# Altium PCB PCB1.PcbDoc
Units mil, origin at the board's own origin, x right, y up, seen from the top; angles counter-clockwise.
Board outline 1200 x 840 mil, 2 copper layers (Top Layer, Bottom Layer); 34 components, 32 nets, 126 pads, 55 vias.
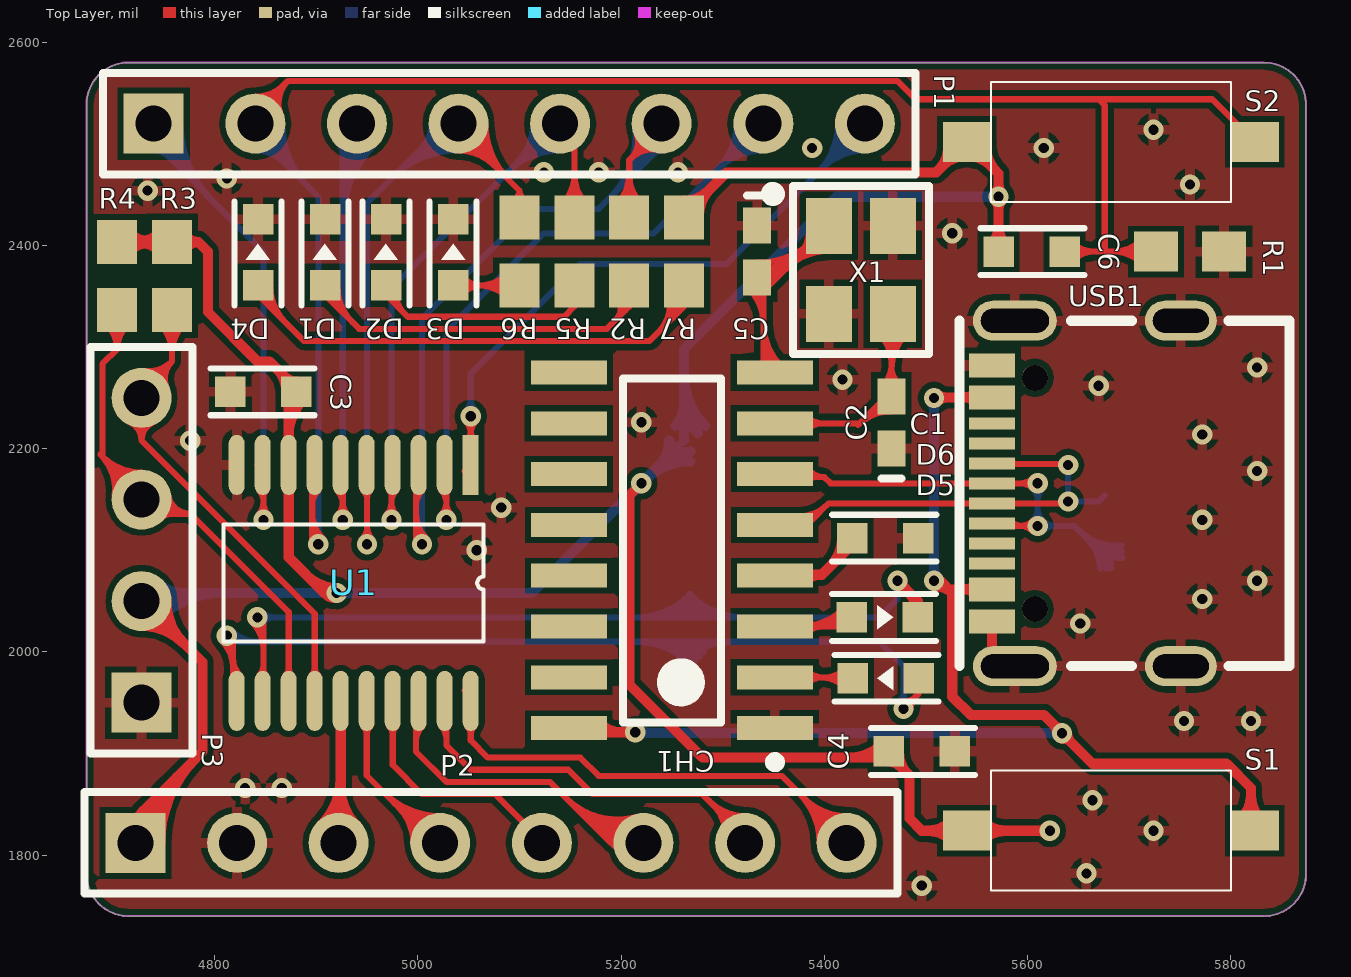
[diagram p0: Top Layer view]
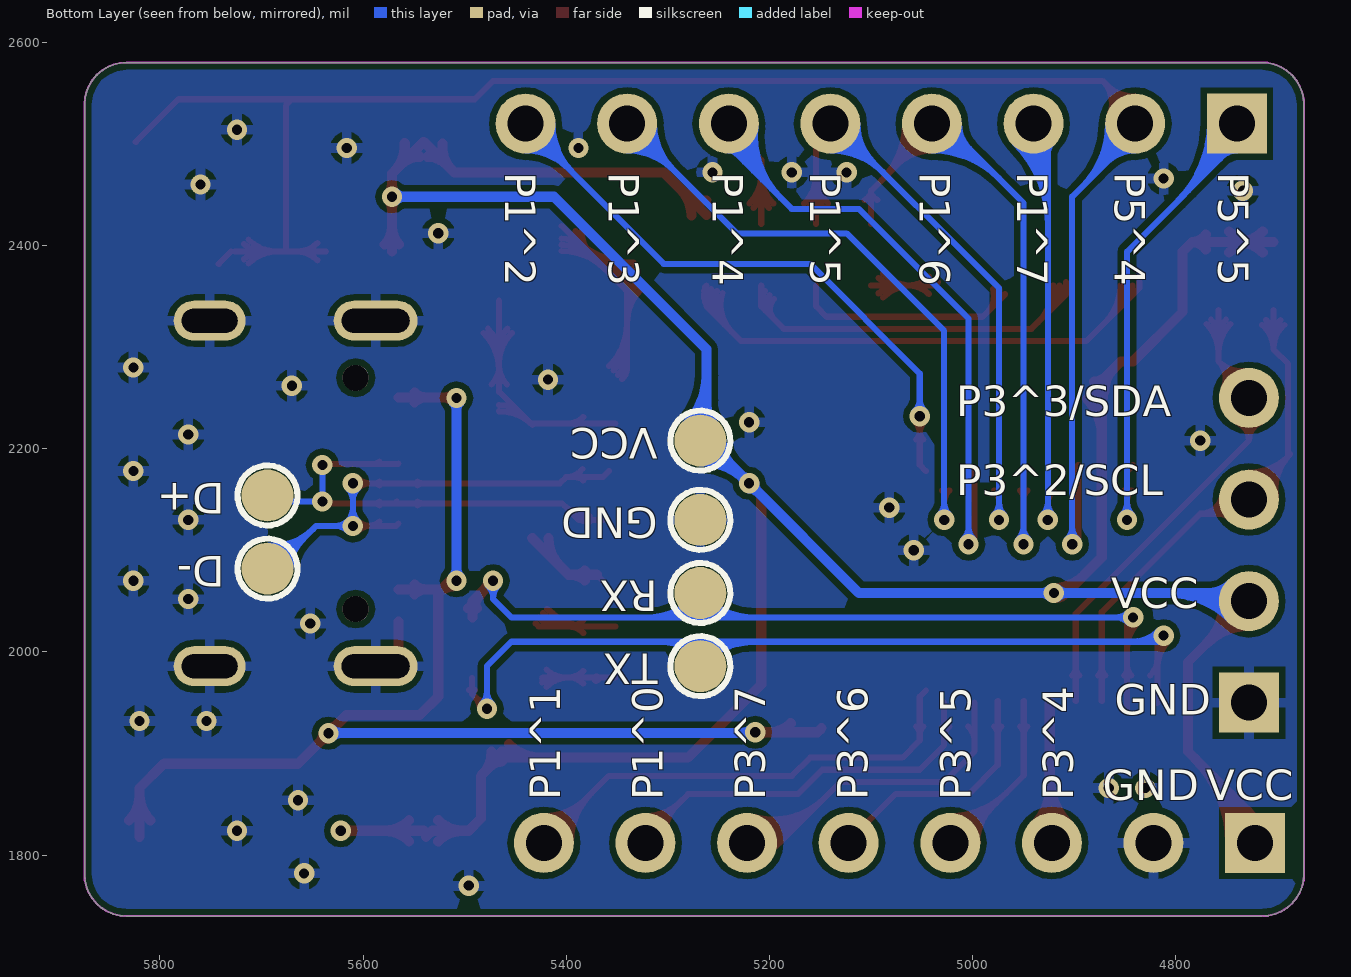
[diagram p1: Bottom Layer view, seen from below]

## Layer stack, top to bottom
Top Layer: signal copper 1.4
Dielectric: dielectric 12.6, FR-4, Dk 4.8
Bottom Layer: signal copper 1.4

## Board outline
4674,1794 4674,1780.97 ccw(c4714.97,1780.97) 4686,1752 ccw(c4714.97,1780.97) 4714.97,1740 4752,1740 5833.03,1740 ccw(c5833.03,1780.97) 5862,1752 ccw(c5833.03,1780.97) 5874,1780.97 5874,1806 5874,2539.03 ccw(c5833.03,2539.03) 5862,2568 ccw(c5833.03,2539.03) 5833.03,2580 5802,2580 4714.97,2580 ccw(c4714.97,2539.03) 4686,2568 ccw(c4714.97,2539.03) 4674,2539.03 4674,2538

## Design rules (kind name [scope] priority, off if disabled: settings)
Clearance [All] p1: gap=6
ComponentClearance [All] p1: gap=6 collisioncheckmode=3 verticalgap=6 showdistances=FALSE
FabricationTestPointUsage TestPointUsage [All] p1: valid=0 allowmultiple=FALSE
FabricationTestpoint Testpoint [All] p1: side=3 testpointundercomponent=TRUE minsize=40 maxsize=100 preferedsize=60 minholesize=0 maxholesize=40 preferedholesize=32 testpointgrid=1 allowsidetop=TRUE allowsidebottom=TRUE usegrid=TRUE gridtolerance=0.01
HoleToHoleClearance [All] p1: gap=6 allowstackedmicrovias=TRUE
MinimumSolderMaskSliver [All] p1 off: minsoldermaskwidth=6
PolygonConnect [All] p1: connectstyle=Relief reliefconductorwidth=10 reliefentries=4 polygonreliefangle="90 Angle"
RoutingVias [All] p1: holewidth=28 width=50 viastyle="Through Hole" minholewidth=6 minwidth=10 maxholewidth=28 maxwidth=50
SilkscreenOverComponentPads [All] p1: minsilkscreentomaskgap=6
SolderMaskExpansion [All] p1: expansion=4
Width [All] p1: maxlimit=10 minlimit=6 preferedwidth=10
22 further rules are at their usual default settings.

## Components (designator, comment, footprint, x,y, rotation, side; value= is the part's Value field where it differs from the comment)
C1 "Cap Semi" C0603 5460,2112 r0 top
C2 "Cap Semi" 0402 5466,2226 r90 top
C3 "10nF" C0603 4848,2256 r0 top
C4 "22uF" C0603 5496,1902 r180 top
C5 "Cap Semi" 0402 5334,2394 r270 top
C6 "" C0603 5604,2394 r180 top
CH1 "" SOIC127P600X170-16N 5250,2100 r180 top
D1 "LED3" 0603D#1 4914,2388 r90 top
D2 "LED3" 0603D#1 4974,2388 r90 top
D3 "LED3" 0603D#1 5040,2388 r90 top
D4 "LED3" 0603D#1 4848,2388 r90 top
D5 "100R/DIO" 0603D#2 5460,1974 r180 top
D6 "1N5819" 0603D#2 5460,2034 r0 top
D+ "Comment" "Test Point" 5694,2154 r180 bottom
D- "Comment" "Test Point" 5694,2082 r180 bottom
GND "Comment" "Test Point" 5268,2130 r180 bottom
P1 "IO1" HDR1X8 4740,2520 r0 top
P2 "IO2" HDR1X8 4722,1812 r0 top
P3 "IIC" HDR1X4 4728,1950 r90 top
R1 "10K" J1-0603 5760,2394 r180 top
R2 "1K" J1-0603 5208,2394 r270 top
R3 "Res3" J1-0603 4758,2370 r90 top
R4 "Res3" J1-0603 4704,2370 r90 top
R5 "1K" J1-0603 5154,2394 r270 top
R6 "1K" J1-0603 5100,2394 r270 top
R7 "1K" J1-0603 5262,2394 r270 top
RX "Comment" "Test Point" 5268,2058 r180 bottom
S1 "SW-PB" KEY_1 5682,1824 r0 top
S2 "SW-PB" KEY_1 5682,2502 r180 top
TX "Comment" "Test Point" 5268,1986 r180 bottom
U1 "STC8G1K08T-TSSOP20" TSSOP20 5052,2184 r270 top locked
USB1 "TYPE-C16PIN" USB-C-SMD_TYPE-C16PIN 5658,2156 r90 top
VCC "Comment" "Test Point" 5268,2208 r180 bottom
X1 "32M" LC_SMD-3225_4P 5436,2376 r270 top

## Footprints (in the part's own frame and the unit in brackets; to place one, negate y for a bottom-side part, rotate by r counter-clockwise, add the part's x,y. Pads: shape width x height; smd on the part's side, far side on the other; paste and mask are expansions set on the pad)
0402 [mm] "Chip Capacitor; Body 1.0 x 0.5 mm (LxW typ)"
  rect 0.9x0.7 smd: 1(-0.65,0) 2(0.65,0)
  silkscreen extent -1.4,-0.25 -1.4,0.25
0603D#1 [mil]
  rect 30x30 smd mask+4: 1(-27.18,5.35) 2(37.82,5.35)
  silkscreen extent -47,-18 55,28, body extent -26,-10 37,21, height 34
0603D#2 [mil]
  rect 30x30 smd mask+4: 1(-32.81,-0.08) 2(32.19,-0.08)
  silkscreen extent -52,-23 50,23, body extent -32,-16 31,16, height 34
C0603 [mil]
  rect 30x30 smd mask+4: 1(-32.5,0) 2(32.5,0)
  silkscreen extent -52,-23 50,23, body extent -31,-16 31,16, height 34
HDR1X4 [mm] "Connector; Header; 4 Position"
  rect 1.5x1.5 hole 0.9: 1(0,0)
  round 1.5 hole 0.9: 2(2.54,0) 3(5.08,0) 4(7.62,0)
  silkscreen extent -1.27,-1.27 8.89,1.27
HDR1X8 [mm] "Connector; Header; 8 Position"
  rect 1.5x1.5 hole 0.9: 1(0,0)
  round 1.5 hole 0.9: 2(2.54,0) 3(5.08,0) 4(7.62,0) 5(10.16,0) 6(12.7,0) 7(15.24,0) 8(17.78,0)
  silkscreen extent -1.27,-1.27 19.05,1.27
J1-0603 [mm] "Chip Resistor; Body 1.6 x 0.8 mm (LxW typ)"
  rect 1.1x1 smd: 1(-0.85,0) 2(0.85,0)
KEY_1 [mm]
  rect 1.2x1 smd: 1(-3.6,0) 2(3.6,0)
  silkscreen extent -3,-1.5 3,1.5, body extent -4,-1.5 4,1.5, height 4.3
LC_SMD-3225_4P [mm]
  rect 1.4x1.15 smd: 1(-1.1,-0.8) 2(1.1,-0.8) 3(1.1,0.8) 4(-1.1,0.8)
  silkscreen extent -2.1,-2.35 2.1,1.7, body extent -1.6,-1.25 1.6,1.25, height 0.61
SOIC127P600X170-16N [mm] "SOIC, 16-Leads, Body 8.6x4.0mm (max), Pitch 1.27mm, IPC Medium Density"
  rect 1.9x0.6 smd: 1(-2.575,4.445) 2(-2.575,3.175) 3(-2.575,1.905) 4(-2.575,0.635) 5(-2.575,-0.635) 6(-2.575,-1.905) 7(-2.575,-3.175) 8(-2.575,-4.445) 9(2.575,-4.445) 10(2.575,-3.175) 11(2.575,-1.905) 12(2.575,-0.635) 13(2.575,0.635) 14(2.575,1.905) 15(2.575,3.175) 16(2.575,4.445)
  silkscreen extent -2.7,-4.3 1.22,5.42, body extent -1.98,-4.28 1.97,4.28, height 1.7
"Test Point" [mm]
  round 1.3 smd mask+0.102: 1(0,0)
  silkscreen extent -0.75,-0.75 0.75,0.75
TSSOP20 [mm]
  rect 1.5x0.4 smd: 1(0,0)
  oval 1.5x0.4 smd: 2(0,-0.65) 3(0,-1.3) 4(0,-1.95) 5(0,-2.6) 6(0,-3.25) 7(0,-3.9) 8(0,-4.55) 9(0,-5.2) 10(0,-5.85) 11(5.9,-5.85) 12(5.9,-5.2) 13(5.9,-4.55) 14(5.9,-3.9) 15(5.9,-3.25) 16(5.9,-2.6) 17(5.9,-1.95) 18(5.9,-1.3) 19(5.9,-0.65) 20(5.9,0)
  silkscreen extent 1.48,-6.18 4.42,0.33
USB-C-SMD_TYPE-C16PIN [mm]
  oval 1x2.099 hole 0.6 slot 1.7 at 90 deg: 1(-4.32,1.787) 2(4.32,1.787)
  oval 1x1.799 hole 0.6 slot 1.4 at 90 deg: 3(-4.32,-2.362) 4(4.32,-2.362)
  rect 0.6x1.15 smd: A1B12(-3.2,2.362) A4B9(-2.4,2.362) B1A12(3.2,2.362) B4A9(2.4,2.362)
  rect 0.3x1.15 smd: A5(-1.25,2.362) A6(-0.25,2.362) A7(0.25,2.362) A8(-1.75,2.362) B5(1.75,2.362) B6(0.75,2.362) B7(-0.75,2.362) B8(1.25,2.362)
  round 0.65 hole 0.65 unplated: ""(-2.89,1.288) ""(2.89,1.288)
  silkscreen extent -4.32,-5.08 4.32,3.17

## Part data
C1 C2 C5: "Capacitor (Semiconductor SIM Model)"
C3 C4 C6: library part "Cap Semi", "Capacitor (Semiconductor SIM Model)"
CH1: library part Component_1
D1 D2 D3 D4: "Typical BLUE SiC LED"
D5 D6: library part Diode, "Default Diode"
P1 P2: library part "Header 8", "Header, 8-Pin"
P3: library part "Header 4", "Header, 4-Pin"
R1 R2 R5 R6 R7: library part Res3, "Resistor"
R3 R4: "Resistor"
S1 S2: "Switch"
X1: library part XTAL_SMD2016_32MHz_8pF_Epson, "XTAL SMD 2016, 32MHz, Cl=8pF, Tol: ?0ppm, Stab: ?0ppm"

## Via types
v1: diameter 20, hole 10, Top Layer to Bottom Layer, tented both sides, 55 vias

## Nets (pads, with @x,y where several pads share a name; then routed paths per layer and width w, separated by ;. In a path a pad name is that pad's centre, name@x,y a point inside that pad or via, vN(x,y) a via of type N, cw(c..) or ccw(c..) an arc to the next point about the centre after c; other vN are vias at no path point)
GND: C1.2 C2.1 C3.1 C4.1 C5.1 CH1.1 D1.2 D2.2 D3.2 D4.2 GND.1 P2.2 P3.1 R1.1 U1.10 USB1.1 USB1.2 USB1.3 USB1.4 USB1.A1B12 USB1.B1A12 X1.2 X1.4 | length 47.7
  Top Layer w10: USB1.A1B12 5564.99,1995.01 USB1.1@5574,1986
  other v1: 5496,1770 5658,1782 5724,1824 5664,1854 4830,1866 4866,1866 5754,1932 5820,1932 5652,2028 5772,2052 5826,2070 5058,2100 5772,2130 5082,2142 5826,2178 4776,2208 5772,2214 5220,2226 5670,2262 5418,2268 5826,2280 5526,2412 4734,2454 5760,2460 4812,2466 5124,2472 5178,2472 5256,2472 5388,2496 5616,2496 5724,2514
LED1: P1.6 R2.1 U1.3 | length 1404.7
  Top Layer w6: 4998,2122.9 ccw(c5020.9,2122.9) v1@5004.71,2106.71 ; 4998,2137.38 ccw(c5035.38,2137.38) v1@5008.95,2110.95 ; 4998,2143.77 cw(c5019.39,2143.77) U1.3@5004.27,2158.9 ; U1.3@4998,2178 4998,2112 v1(5004,2106) ; R2.1@5196.2,2441.23 ccw(c5167.72,2469.71) 5208,2469.71 ccw(c5248.28,2469.71) R2.1@5219.8,2441.23 ; R2.1@5200.44,2436.99 ccw(c5182.2,2455.23) 5208,2455.23 ccw(c5233.8,2455.23) R2.1@5215.56,2436.99 ; R2.1@5208,2421.46 5208,2484 P1.6@5238,2514 ; P1.6@5215.23,2510.52 cw(c5193.72,2502.29) 5210,2486 cw(c5230.17,2465.83) P1.6@5235.27,2493.9 ; 5216.54,2492.54 ccw(c5203.18,2505.91) P1.6@5220.83,2512.66 ; 5218.1,2494.1 cw(c5232.66,2479.54) P1.6@5236.34,2499.8
  Bottom Layer w6: v1@4999.05,2110.95 ccw(c4987.1,2122.9) 5004,2122.9 ccw(c5020.9,2122.9) v1@5008.95,2110.95 ; v1(5004,2106) 5004,2238 ; 5004,2184 5004,2238 ; 5189,2447 ccw(c5128.3,2507.71) P1.6@5213.63,2517.1 ; 5197.84,2455.84 ccw(c5144.23,2509.46) P1.6@5219.6,2517.75 ; 5206.68,2464.68 ccw(c5160.15,2511.21) P1.6@5225.56,2518.41 ; 5215.52,2473.52 ccw(c5176.08,2512.96) P1.6@5231.52,2519.07 ; 5224.36,2482.36 ccw(c5192,2514.72) P1.6@5237.49,2519.72 ; 5232.27,2490.27 cw(c5240,2482.54) P1.6@5240,2493.47 ; 5233.2,2491.2 ccw(c5207.93,2516.47) P1.6@5243.45,2520.38 ; P1.6@5244,2514 5244,2502 5178,2436 5112,2436 5004,2328 5004,2238
LED2: P1.5 R5.1 U1.4 | length 1069.6
  Top Layer w6: v1@4969.05,2134.95 ccw(c4957.1,2146.9) 4974,2146.9 ccw(c4990.9,2146.9) v1@4978.95,2134.95 ; U1.4@4971.78,2158.9 cw(c4966.43,2153.54) 4974,2153.54 ; v1(4974,2130) U1.4@4974,2178 ; 4974,2147.61 cw(c4989.96,2147.61) U1.4@4978.67,2158.9 ; P1.5@5142,2514 5154,2502 R5.1@5154,2421.46 ; R5.1@5142.2,2441.23 ccw(c5113.72,2469.71) 5154,2469.71 ccw(c5194.28,2469.71) R5.1@5165.8,2441.23 ; R5.1@5146.44,2436.99 ccw(c5128.2,2455.23) 5154,2455.23 ccw(c5179.8,2455.23) R5.1@5161.56,2436.99
  Bottom Layer w6: v1@4969.05,2134.95 ccw(c4957.1,2146.9) 4974,2146.9 ccw(c4990.9,2146.9) v1@4978.95,2134.95 ; v1(4974,2130) 4974,2232 ; 4974,2154 4974,2232 ; 5087.89,2471.89 cw(c5140,2419.77) P1.5@5140,2493.47 ; 5097.54,2481.54 ccw(c5059.09,2520) P1.5@5113.47,2520 ; 5098.13,2482.13 cw(c5140,2440.26) P1.5@5140,2499.47 ; 5107.79,2491.79 ccw(c5079.57,2520) P1.5@5119.47,2520 ; 5108.37,2492.37 cw(c5140,2460.74) P1.5@5140,2505.47 ; P1.5@5136,2520 4974,2358 4974,2232
LED3: P1.4 R6.1 U1.5 | length 1309.1
  Top Layer w6: v1@4945.05,2110.95 ccw(c4933.1,2122.9) 4950,2122.9 ccw(c4966.9,2122.9) v1@4954.95,2110.95 ; U1.5@4946.19,2158.9 cw(c4937,2149.7) 4950,2149.7 ; v1(4950,2106) U1.5@4950,2178 ; 4950,2151.45 cw(c4960.53,2151.45) U1.5@4953.08,2158.9 ; P1.4@5040,2493.47 cw(c5040,2443.91) 5075.04,2478.96 ; P1.4@5040,2499.47 cw(c5040,2464.4) 5064.8,2489.2 ; P1.4@5040,2514 5100,2454 ; P1.4@5048.53,2520 ccw(c5083.6,2520) 5058.8,2495.2 ; P1.4@5054.53,2520 ccw(c5104.09,2520) 5069.04,2484.96 ; P1.4@5060.53,2520 ccw(c5124.57,2520) 5079.29,2474.71 ; P1.4@5066.53,2520 ccw(c5145.06,2520) 5089.53,2464.47 ; R6.1@5093.85,2444.94 ccw(c5090.26,2454) 5100,2454 ; R6.1@5100,2421.46 5100,2454 ; R6.1@5106.15,2444.94 cw(c5109.74,2454) 5100,2454
  Bottom Layer w6: v1@4945.05,2110.95 ccw(c4933.1,2122.9) 4950,2122.9 ccw(c4966.9,2122.9) v1@4954.95,2110.95 ; v1(4950,2106) 4950,2232 ; 4950,2184 4950,2232 ; 4974.23,2466.23 cw(c5040,2400.46) P1.4@5040,2493.47 ; 4984.47,2476.47 cw(c5040,2420.94) P1.4@5040,2499.47 ; 4994.71,2486.71 cw(c5040,2441.43) P1.4@5040,2505.47 ; 5003.2,2495.2 ccw(c4978.4,2520) P1.4@5013.47,2520 ; 5004.96,2496.96 cw(c5040,2461.91) P1.4@5040,2511.47 ; 5013.44,2505.44 ccw(c4998.89,2520) P1.4@5019.47,2520 ; P1.4@5046,2520 P1.4 5028,2520 4950,2442 4950,2232
LED4: P1.3 U1.6 | length 935.2
  Top Layer w6: U1.6@4920.6,2158.9 cw(c4907.57,2145.86) 4926,2145.86 ; v1@4921.05,2134.95 ccw(c4909.1,2146.9) 4926,2146.9 ccw(c4942.9,2146.9) v1@4930.95,2134.95 ; v1(4926,2130) U1.6@4926,2184
  Bottom Layer w6: v1@4921.05,2134.95 ccw(c4909.1,2146.9) 4926,2146.9 ccw(c4942.9,2146.9) v1@4930.95,2134.95 ; P1.3@4921.24,2501.24 cw(c4909.76,2489.76) 4926,2489.76 ; v1(4926,2130) 4926,2238 ; 4926,2154 4926,2238 ; 4926,2422.16 cw(c5037.84,2422.16) P1.3@4958.76,2501.24 ; 4926,2436.64 cw(c5023.36,2436.64) P1.3@4954.52,2505.48 ; 4926,2451.13 cw(c5008.87,2451.13) P1.3@4950.27,2509.73 ; 4926,2465.61 cw(c4994.39,2465.61) P1.3@4946.03,2513.97 ; 4926,2480.1 cw(c4979.9,2480.1) P1.3@4941.79,2518.21 ; P1.3@4944,2514 4926,2496 4926,2238
NetC1_1: C1.1 CH1.4 | length 143.1
  Top Layer w6: CH1.4@5364,2070 CH1.4@5370,2076
  Top Layer w10: CH1.4@5370,2076 5397.5,2076 C1.1@5433.5,2112 ; CH1.4@5381.78,2070.18 cw(c5395.83,2056.14) 5395.83,2076 ; CH1.4@5381.78,2079.82 ccw(c5391,2089.03) 5391,2076 ; 5406.19,2084.69 ccw(c5378.87,2112) C1.1@5417.5,2112
NetC2_2: C2.2 CH1.7 X1.3 | length 479.1
  Top Layer w6: CH1.7 5435,2225 5466,2256 X1.3@5466,2346 ; CH1.7@5383.2,2218.77 cw(c5398.24,2203.73) 5398.24,2225 cw(c5398.24,2246.27) CH1.7@5383.2,2231.23 ; 5433.35,2223.35 cw(c5466,2190.7) C2.2@5466,2236.87 ; 5443.59,2233.59 cw(c5466,2211.18) C2.2@5466,2242.87 ; X1.3@5453.61,2313.88 cw(c5423.7,2283.97) 5466,2283.97 ; X1.3@5457.85,2318.13 cw(c5438.18,2298.46) 5466,2298.46 ; C2.2@5458.38,2263.15 ccw(c5439.98,2281.55) 5466,2281.55 ccw(c5492.02,2281.55) C2.2@5473.62,2263.15 ; 5466,2276.75 cw(c5518.52,2276.75) X1.3@5481.38,2313.88 ; 5466,2291.23 cw(c5504.03,2291.23) X1.3@5477.14,2318.13
NetC5_2: C5.2 CH1.8 X1.1 | length 719
  Top Layer w6: C5.2@5326.38,2356.85 cw(c5293.49,2323.96) 5340,2323.96 ; C5.2@5330.62,2361.09 cw(c5307.98,2338.45) 5340,2338.45 ; C5.2@5334,2353.13 ccw(c5334,2363.57) C5.2@5341.38,2356.18 ; C5.2@5334,2359.13 ccw(c5334,2384.05) 5351.62,2366.43 ; C5.2@5334,2365.13 ccw(c5334,2404.54) 5361.87,2376.67 ; C5.2@5334,2371.13 ccw(c5334,2425.02) 5372.11,2386.91 ; C5.2@5334,2377.13 ccw(c5334,2445.51) X1.1@5382.35,2397.15 ; C5.2@5334,2383.13 ccw(c5334,2465.99) X1.1@5392.6,2407.4 ; CH1.8@5340,2279.13 5340,2354.8 X1.1 ; CH1.8@5340,2280.28 ccw(c5356.66,2280.28) CH1.8@5344.88,2268.5 ; 5340,2294.77 ccw(c5371.15,2294.77) CH1.8@5349.12,2272.75 ; 5340,2309.26 ccw(c5385.63,2309.26) CH1.8@5353.37,2276.99 ; 5340,2323.74 ccw(c5400.12,2323.74) CH1.8@5357.61,2281.23 ; 5362.58,2377.38 cw(c5404.5,2335.46) X1.1@5404.5,2394.75 ; 5372.82,2387.62 cw(c5404.5,2355.94) X1.1@5404.5,2400.75 ; 5374.46,2389.26 ccw(c5349.34,2414.38) X1.1@5384.87,2414.38 ; X1.1@5383.06,2397.87 cw(c5404.5,2376.43) X1.1@5404.5,2406.75 ; X1.1@5384.7,2399.5 ccw(c5369.82,2414.38) X1.1@5390.87,2414.38
NetD1_1: D1.1 R2.2 | length 509.2
  Top Layer w6: D1.1@4908,2364 4908,2352 4942.12,2317.88 5185.88,2317.88 5208,2340 R2.2 ; D1.1 ccw(c4931.49,2360.82) 4915.34,2344.66 ; D1.1@4914.65,2360.82 ccw(c4951.97,2360.82) 4925.58,2334.42 ; D1.1@4920.65,2360.82 ccw(c4972.46,2360.82) 4935.82,2324.18 ; 5195.17,2327.17 ccw(c5184.82,2337.51) R2.2@5195.65,2347.35 ; 5199.62,2331.62 ccw(c5189.49,2341.75) R2.2@5200.09,2351.38 ; 5204.07,2336.07 ccw(c5194.15,2345.99) R2.2@5204.53,2355.42
NetD2_1: D2.1 R5.2 | length 263
  Top Layer w6: D2.1@4968,2352 4990.12,2329.88 5143.88,2329.88 5154,2340 R5.2 ; D2.1@4974.34,2358.94 ccw(c4990.58,2353.59) 4978.49,2341.51 ; D2.1@4980.04,2357.06 ccw(c5000.95,2350.18) 4985.39,2334.61
NetD3_1: D3.1 R6.2 | length 228.9
  Top Layer w6: D3.1@5034,2364 5037.46,2360.54 R6.2 ; D3.1@5038.89,2365.06 ccw(c5049.81,2375.98) 5049.81,2360.54 ; D3.1@5043.13,2352.33 cw(c5062.94,2332.52) 5062.94,2360.54 ; D3.1@5043.13,2369.3 ccw(c5064.29,2390.46) 5064.29,2360.54 ; R6.2@5088.2,2348.74 ccw(c5059.72,2320.25) 5059.72,2360.54 ccw(c5059.72,2400.82) R6.2@5088.2,2372.33 ; R6.2@5092.44,2352.98 ccw(c5074.2,2334.74) 5074.2,2360.54 ccw(c5074.2,2386.33) R6.2@5092.44,2368.09
NetD4_1: D4.1 R7.2 | length 708.9
  Top Layer w6: D4.1@4836,2364 4836,2358 4888.12,2305.88 5227.88,2305.88 5262,2340 R7.2 ; D4.1 ccw(c4865.49,2360.82) 4849.34,2344.66 ; D4.1@4848.65,2360.82 ccw(c4885.97,2360.82) 4859.58,2334.42 ; D4.1@4854.65,2360.82 ccw(c4906.46,2360.82) 4869.82,2324.18 ; 5237.17,2315.17 ccw(c5210.82,2341.52) R7.2@5246.17,2353.29 ; 5244.03,2322.03 ccw(c5221.12,2344.95) R7.2@5251.86,2355.19 ; 5250.9,2328.9 ccw(c5231.42,2348.38) R7.2@5257.56,2357.09 ; 5257.76,2335.76 ccw(c5241.72,2351.81) R7.2@5263.25,2358.98
NetD5_1: D5.1 TX.1 U1.11 | length 1297.2
  Top Layer w6: v1@4807.05,2011.05 cw(c4780.62,1984.62) 4818,1984.62 ; v1@4811.29,2015.29 cw(c4795.1,1999.1) 4818,1999.1 ; v1(4812,2016) 4818,2010 U1.11@4818,1950 ; 4818,1994.03 ccw(c4842.35,1994.03) U1.11@4825.13,1976.82 ; v1(5478,1944) 5492.81,1958.81 ; v1@5478,1951 ccw(c5478,1967.9) 5489.95,1955.95 ccw(c5501.9,1944) v1@5485,1944 ; D5.1@5489.98,1962.42 cw(c5489.11,1958.82) 5492.81,1958.82 ; D5.1 5492.81,1958.81 ; D5.1@5495.65,1962.42 ccw(c5496.52,1958.82) 5492.81,1958.82
  Bottom Layer w6: v1(4812,2016) 4818,2010 5454,2010 5478,1986 v1(5478,1944) ; v1@4812.71,2016.71 ccw(c4828.9,2032.9) 4828.9,2010 ; v1@4816.95,2020.95 ccw(c4843.38,2047.38) 4843.38,2010 ; 5213.46,2010 cw(c5213.46,1931.46) TX.1@5269,1987 ; 5227.95,2010 cw(c5227.95,1945.95) TX.1@5273.24,1991.24 ; 5242.43,2010 cw(c5242.43,1960.43) TX.1@5277.48,1995.48 ; TX.1@5254.28,1999.72 cw(c5279.08,1974.92) 5279.08,2010 ; 5256.92,2010 cw(c5256.92,1974.92) TX.1@5281.72,1999.72 ; TX.1@5258.52,1995.48 cw(c5293.57,1960.43) 5293.57,2010 ; TX.1@5262.76,1991.24 cw(c5308.05,1945.95) 5308.05,2010 ; v1@5473.05,1948.95 ccw(c5461.1,1960.9) 5478,1960.9 ccw(c5494.9,1960.9) v1@5482.95,1948.95
NetD6_2: D6.2 RX.1 U1.12 | length 1334.4
  Top Layer w6: v1@4837.05,2029.05 cw(c4810.62,2002.62) 4848,2002.62 ; v1@4841.29,2033.29 cw(c4825.1,2017.1) 4848,2017.1 ; v1(4842,2034) 4848,2028 U1.12@4848,1944 ; U1.12@4843.83,1976.82 ccw(c4833.76,1986.89) 4848,1986.89 ; 4848,1983.39 ccw(c4857.29,1983.39) U1.12@4850.72,1976.82
  Top Layer w10: v1@5472,2065 cw(c5472,2052.93) 5480.54,2061.46 cw(c5489.07,2070) v1@5477,2070 ; v1(5472,2070) 5492.19,2049.81 ; 5481.04,2060.96 cw(c5454.14,2034.06) D6.2 5492.19,2049.81 ; D6.2@5487.86,2042.94 ccw(c5484.56,2049.81) 5492.19,2049.81 ; D6.2@5496.51,2042.94 cw(c5499.81,2049.81) 5492.19,2049.81
  Bottom Layer w6: v1(4842,2034) 5454,2034 5472,2052 v1(5472,2070) ; v1@4846.95,2029.05 cw(c4858.9,2017.1) 4858.9,2034 cw(c4858.9,2050.9) v1@4846.95,2038.95 ; 5213.46,2034 ccw(c5213.46,2112.54) RX.1@5269,2057 ; 5227.95,2034 ccw(c5227.95,2098.05) RX.1@5273.24,2052.76 ; 5242.43,2034 ccw(c5242.43,2083.57) RX.1@5277.48,2048.52 ; RX.1@5254.28,2044.28 ccw(c5279.08,2069.08) 5279.08,2034 ; 5256.92,2034 ccw(c5256.92,2069.08) RX.1@5281.72,2044.28 ; RX.1@5258.52,2048.52 ccw(c5293.57,2083.57) 5293.57,2034 ; RX.1@5262.76,2052.76 ccw(c5308.05,2098.05) 5308.05,2034 ; RX.1@5267,2057 ccw(c5322.54,2112.54) 5322.54,2034 ; v1@5467.05,2065.05 cw(c5455.1,2053.1) 5472,2053.1 cw(c5488.9,2053.1) v1@5476.95,2065.05
P1.0: P2.7 U1.19 | length 543.6
  Top Layer w6: U1.19@5022.96,1926.62 cw(c5010.8,1914.46) 5028,1914.46 ; 5028,1922.14 cw(c5034.34,1922.14) U1.19@5029.86,1926.62 ; U1.19@5028,1950 5028,1908 5052,1884 5076,1884 ; 5064,1884 5076,1884 ; 5286.96,1853.04 ccw(c5322,1888.09) P2.7@5322,1838.53 ; 5291.19,1848.81 cw(c5264.32,1821.94) P2.7@5301.77,1815.48 ; 5297.2,1842.8 ccw(c5322,1867.6) P2.7@5322,1832.53 ; 5299.38,1840.62 cw(c5278.29,1819.53) P2.7@5307.68,1814.47 ; P2.7@5328,1812 5286,1854 5280,1860 5172,1860 5148,1884 5076,1884
P1.1: P2.8 U1.20 | length 725.8
  Top Layer w6: U1.20@5046,1962 5052,1956 U1.20 5052,1912.97 5068.97,1896 5160,1896 5178,1878 5358,1878 P2.8@5430,1806 ; U1.20@5048.55,1926.62 cw(c5040.23,1918.3) 5052,1918.3 cw(c5063.77,1918.3) U1.20@5055.45,1926.62 ; 5375.3,1860.7 cw(c5326.6,1812) P2.8@5395.47,1812 ; 5380.13,1855.87 ccw(c5422,1897.74) P2.8@5422,1838.53 ; 5385.54,1850.46 cw(c5347.09,1812) P2.8@5401.47,1812 ; 5390.37,1845.63 ccw(c5422,1877.26) P2.8@5422,1832.53 ; 5395.79,1840.21 cw(c5367.57,1812) P2.8@5407.47,1812 ; 5400.61,1835.39 ccw(c5422,1856.77) P2.8@5422,1826.53
P1.2: P1.8 U1.1 | length 893
  Top Layer w6: U1.1@5046,2178 U1.1 v1(5052,2232) ; v1@5047.05,2227.05 cw(c5035.1,2215.1) 5052,2215.1 cw(c5068.9,2215.1) v1@5056.95,2227.05 ; U1.1@5048.55,2209.1 ccw(c5040.23,2217.42) 5052,2217.42 ccw(c5063.77,2217.42) U1.1@5055.45,2209.1
  Bottom Layer w6: v1@5047.05,2236.95 ccw(c5035.1,2248.9) 5052,2248.9 ccw(c5068.9,2248.9) v1@5056.95,2236.95 ; v1(5052,2232) 5052,2274 5160,2382 5304,2382 5436,2514 P1.8@5442,2514 ; 5393.3,2471.3 ccw(c5344.6,2520) P1.8@5413.47,2520 ; 5398.13,2476.13 cw(c5440,2434.26) P1.8@5440,2493.47 ; 5403.54,2481.54 ccw(c5365.09,2520) P1.8@5419.47,2520 ; 5408.37,2486.37 cw(c5440,2454.74) P1.8@5440,2499.47 ; 5413.79,2491.79 ccw(c5385.57,2520) P1.8@5425.47,2520 ; 5418.61,2496.61 cw(c5440,2475.23) P1.8@5440,2505.47
P1.3: P1.7 U1.2 | length 1005.1
  Top Layer w6: U1.2@5022.96,2158.9 cw(c5010.8,2146.74) 5028,2146.74 ; v1@5023.05,2134.95 ccw(c5011.1,2146.9) 5028,2146.9 ccw(c5044.9,2146.9) v1@5032.95,2134.95 ; v1(5028,2130) U1.2@5028,2184 ; 5028,2154.42 cw(c5034.34,2154.42) U1.2@5029.86,2158.9
  Bottom Layer w6: v1@5023.05,2134.95 ccw(c5011.1,2146.9) 5028,2146.9 ccw(c5044.9,2146.9) v1@5032.95,2134.95 ; v1(5028,2130) 5028,2226 ; 5028,2154 5028,2226 ; P1.7@5313.47,2520 cw(c5249.43,2520) 5294.71,2474.71 cw(c5340,2429.43) P1.7@5340,2493.47 ; P1.7@5319.47,2520 cw(c5269.91,2520) 5304.96,2484.96 cw(c5340,2449.91) P1.7@5340,2499.47 ; P1.7@5325.47,2520 cw(c5290.4,2520) 5315.2,2495.2 cw(c5340,2470.4) P1.7@5340,2505.47 ; P1.7@5334,2514 5232,2412 5124,2412 5028,2316 5028,2226
P3.2: P3.3 R4.1 U1.13 | length 894.2
  Top Layer w6: 4687.47,2194.53 cw(c4652.29,2159.34) P3.3@4701.67,2153.25 ; 4689.54,2192.46 ccw(c4728,2230.91) P3.3@4728,2176.53 ; R4.1@4693.07,2321.96 cw(c4672.28,2298) 4704,2298 ; 4696.17,2185.83 cw(c4667.77,2157.43) P3.3@4707.63,2152.51 ; R4.1@4697,2326.5 cw(c4683.68,2311.15) 4704,2311.15 cw(c4724.32,2311.15) R4.1@4711,2326.5 ; 4699.79,2182.21 ccw(c4728,2210.43) P3.3@4728,2170.53 ; R4.1 4704,2298 ; 4704.86,2177.14 cw(c4683.24,2155.52) P3.3@4713.58,2151.78 ; R4.1@4714.93,2321.96 ccw(c4735.72,2298) 4704,2298 ; P3.3@4722,2160 4689.47,2192.53 4689.47,2283.47 4704,2298 ; P3.3@4728,2148 P3.3@4730,2148 ; P3.3 P3.3@4730,2148 ; P3.3@4736.41,2151.43 ccw(c4754.68,2154.54) 4754.68,2136 ; P3.3@4742.32,2152.43 ccw(c4761.79,2155.74) 4761.79,2136 ; P3.3@4746.76,2131.24 cw(c4758.24,2119.76) 4758.24,2136 ; P3.3@4748.24,2153.44 ccw(c4768.89,2156.95) 4768.89,2136 ; P3.3@4754.15,2154.45 ccw(c4776,2158.16) 4776,2136 ; U1.13@4869.42,1976.82 ccw(c4861.1,1985.14) 4872.87,1985.14 ccw(c4884.63,1985.14) U1.13@4876.31,1976.82 ; U1.13 4872.87,2039.13 4776,2136 ; P3.3@4730,2148 4742,2136 4776,2136
P3.3: P3.4 R3.1 U1.14 | length 778.6
  Top Layer w6: P3.4@4716.6,2226.05 cw(c4708.02,2208) 4728,2208 ; P3.4@4719.18,2231.46 cw(c4712.54,2217.5) 4728,2217.5 cw(c4743.46,2217.5) P3.4@4736.82,2231.46 ; P3.4@4728,2262 P3.4@4728,2256 ; P3.4@4730.16,2270.41 ccw(c4732.62,2293.6) 4749.11,2277.11 ; P3.4@4730.8,2276.38 ccw(c4734.33,2309.67) 4758,2286 ; P3.4@4739.4,2226.05 ccw(c4747.98,2208) 4728,2208 ; R3.1@4746.2,2322.77 cw(c4717.72,2294.29) 4758,2294.29 cw(c4798.28,2294.29) R3.1@4769.8,2322.77 ; P3.4@4747.06,2257.62 cw(c4765.95,2265.18) 4751.56,2279.56 ; R3.1@4750.44,2327.01 cw(c4732.2,2308.77) 4758,2308.77 cw(c4783.8,2308.77) R3.1@4765.56,2327.01 ; P3.4@4752.63,2259.85 cw(c4775.14,2268.85) 4758,2286 ; R3.1 4758,2286 ; U1.14@4895.01,1976.82 ccw(c4886.69,1985.14) 4898.46,1985.14 ccw(c4910.22,1985.14) U1.14@4901.9,1976.82 ; U1.14 4898.46,2037.54 4728,2208 ; 4728,2208 4728,2232 P3.4 P3.4@4728,2256 ; P3.4@4728,2256 4758,2286
P3.4: P2.3 U1.15 | length 288.4
  Top Layer w6: P2.3@4920,1824 P2.3@4924.05,1828.05
  Top Layer w10: P2.3@4904.66,1829.34 ccw(c4857.84,1876.16) 4924.05,1876.16 ; P2.3@4911.73,1822.27 ccw(c4881.99,1852.01) 4924.05,1852.01 ; 4924.05,1842.13 ccw(c4952.13,1842.13) P2.3@4932.27,1822.27 ; 4924.05,1866.27 ccw(c4976.27,1866.27) P2.3@4939.34,1829.34 ; U1.15 4924.05,1819.95 P2.3@4926,1818
P3.5: P2.4 U1.16 | length 445.1
  Top Layer w6: U1.16@4946.19,1926.62 cw(c4937.87,1918.3) 4949.64,1918.3 cw(c4961.4,1918.3) U1.16@4953.08,1926.62 ; U1.16 4949.64,1878.36 5022,1806 P2.4 ; 4966.47,1861.53 ccw(c5022,1917.06) P2.4@5022,1838.53 ; 4976.71,1851.29 ccw(c5022,1896.57) P2.4@5022,1832.53 ; 4980.96,1847.04 cw(c4945.91,1812) P2.4@4995.47,1812 ; 4986.96,1841.04 ccw(c5022,1876.09) P2.4@5022,1826.53 ; 4991.2,1836.8 cw(c4966.4,1812) P2.4@5001.47,1812 ; 4997.2,1830.8 ccw(c5022,1855.6) P2.4@5022,1820.53
P3.6: P2.5 U1.17 | length 288.2
  Top Layer w6: U1.17@4971.78,1926.62 cw(c4963.46,1918.3) 4975.23,1918.3 cw(c4987,1918.3) U1.17@4978.67,1926.62 ; U1.17 4975.23,1888.77 5004,1860 5076,1860 ; 5054.06,1860 5076,1860 ; P2.5@5124,1806 P2.5@5127,1809 ; P2.5@5124,1812 5076,1860
P3.7: P2.6 U1.18 | length 746.1
  Top Layer w6: 4998,1911.49 cw(c5019.39,1911.49) U1.18@5004.27,1926.62 ; U1.18@4998,1950 4998,1902 5028,1872 5076,1872 ; 5059.03,1872 5076,1872 ; 5146,1856 ccw(c5196.41,1906.4) P2.6@5215.06,1837.6 ; 5153.33,1848.67 ccw(c5199.53,1894.88) P2.6@5216.63,1831.81 ; 5160.65,1841.35 ccw(c5202.65,1883.36) P2.6@5218.2,1826.02 ; 5167.97,1834.03 ccw(c5205.78,1871.83) P2.6@5219.77,1820.23 ; 5175.3,1826.7 ccw(c5208.9,1860.31) P2.6@5221.34,1814.44 ; 5182.62,1819.38 ccw(c5212.03,1848.79) P2.6@5222.91,1808.65 ; 5189.94,1812.06 ccw(c5215.15,1837.26) P2.6@5224.48,1802.86 ; P2.6@5232,1812 P2.6 5190,1812 5130,1872 5076,1872
P5.4: C6.1 P1.2 R1.2 S2.1 U1.7 | length 2501.3
  Top Layer w6: P1.2@4836,2526 4872,2562 ; P1.2@4840,2540.53 ccw(c4840,2565.94) 4857.97,2547.97 ; P1.2@4840,2546.53 ccw(c4840,2586.43) 4868.21,2558.21 ; P1.2@4853.62,2525.07 cw(c4874.67,2532.9) 4858.78,2548.78 ; P1.2@4859.24,2527.16 cw(c4884.3,2536.48) 4865.39,2555.39 ; P1.2@4864.86,2529.25 cw(c4893.93,2540.07) 4872,2562 ; 4896,2122.9 ccw(c4918.9,2122.9) v1@4902.71,2106.71 ; 4896,2137.38 ccw(c4933.38,2137.38) v1@4906.95,2110.95 ; 4896,2144.65 cw(c4916.15,2144.65) U1.7@4901.9,2158.9 ; U1.7@4896,2184 4896,2112 v1(4902,2106) ; C6.1 5676,2394 ; C6.1@5644.99,2385.51 cw(c5665.47,2365.03) 5665.47,2394 cw(c5665.47,2422.97) C6.1@5644.99,2402.49 ; R1.2@5712.77,2382.2 ccw(c5684.29,2353.72) 5684.29,2394 ccw(c5684.29,2434.28) R1.2@5712.77,2405.8 ; R1.2@5717.01,2386.44 ccw(c5698.77,2368.2) 5698.77,2394 ccw(c5698.77,2419.8) R1.2@5717.01,2401.56 ; R1.2 5676,2394 ; R1.2@5730,2394 R1.2@5742,2382 ; S2.1 5781.73,2544 5670,2544 ; 4872,2562 5472,2562 5490,2544 5670,2544 ; 5670,2544 5676,2538 5676,2394
  Bottom Layer w6: P1.2@4830,2520 4902,2448 4902,2232 ; P1.2@4840,2493.47 cw(c4840,2453.57) 4868.21,2481.79 ; P1.2@4840,2499.47 cw(c4840,2474.06) 4857.97,2492.03 ; P1.2@4848.53,2520 ccw(c4893.26,2520) 4861.63,2488.37 ; P1.2@4854.53,2520 ccw(c4913.74,2520) 4871.87,2478.13 ; P1.2@4860.53,2520 ccw(c4934.23,2520) 4882.11,2467.89 ; P1.2@4866.53,2520 ccw(c4954.71,2520) 4892.36,2457.64 ; v1@4897.05,2110.95 ccw(c4885.1,2122.9) 4902,2122.9 ccw(c4918.9,2122.9) v1@4906.95,2110.95 ; v1(4902,2106) 4902,2232 ; 4902,2184 4902,2232
P5.5: P1.1 U1.9 | length 895.8
  Top Layer w6: U1.9@4842,2184 4848,2178 v1(4848,2130) ; v1@4843.05,2134.95 ccw(c4831.1,2146.9) 4848,2146.9 ccw(c4864.9,2146.9) v1@4852.95,2134.95 ; U1.9@4843.83,2158.9 cw(c4833.76,2148.83) 4848,2148.83 ; 4848,2152.33 cw(c4857.29,2152.33) U1.9@4850.72,2158.9
  Bottom Layer w6: P1.1@4734,2508 4848,2394 4848,2202 ; P1.1@4740,2493.47 cw(c4740,2472.89) 4754.56,2487.44 ; P1.1@4742.53,2520 ccw(c4792.09,2520) 4757.04,2484.96 ; P1.1@4748.53,2520 ccw(c4812.57,2520) 4767.29,2474.71 ; P1.1@4754.53,2520 ccw(c4833.06,2520) 4777.53,2464.47 ; P1.1@4760.53,2520 ccw(c4853.54,2520) 4787.77,2454.23 ; P1.1@4766.53,2520 ccw(c4874.03,2520) 4798.01,2443.99 ; v1@4843.05,2134.95 ccw(c4831.1,2146.9) 4848,2146.9 ccw(c4864.9,2146.9) v1@4852.95,2134.95 ; v1(4848,2130) 4848,2202 ; 4848,2184 4848,2202
RXT: CH1.3 D6.1 | length 219.2
  Top Layer w6: CH1.3 5427,2025 D6.1@5430,2028 ; CH1.3@5376.68,2025 ccw(c5376.68,2084.43) D6.1@5418.7,2042.41 ; CH1.3@5383.2,2018.77 cw(c5398.24,2003.73) 5398.24,2025 cw(c5398.24,2046.27) CH1.3@5383.2,2031.23 ; 5391.16,2025 ccw(c5391.16,2069.94) D6.1@5422.94,2038.16 ; 5405.65,2025 ccw(c5405.65,2055.46) D6.1
TXD: CH1.2 D5.2 | length 166.7
  Top Layer w6: CH1.2 5423,1975 D5.2@5424,1974 ; CH1.2@5383.2,1968.77 cw(c5398.24,1953.73) 5398.24,1975 cw(c5398.24,1996.27) CH1.2@5383.2,1981.23 ; 5396.62,1975 cw(c5396.62,1942.88) D5.2@5419.33,1965.59 ; 5401.07,1975 ccw(c5401.07,2000.83) D5.2@5419.33,1982.56 ; 5411.11,1975 cw(c5411.11,1957.37) D5.2@5423.57,1969.84
  Top Layer w10: CH1.2@5370,1974 CH1.2@5370.65,1973.35
UD+: CH1.5 D+.1 USB1.A6 USB1.B6 | length 500
  Top Layer w6: CH1.5@5364,2130 5388,2130 5404.16,2146.16 USB1.A6 ; CH1.5@5376.97,2127.81 ccw(c5376.97,2149.16) 5392.06,2134.06 ; CH1.5@5376.97,2133.81 ccw(c5376.97,2169.64) 5402.31,2144.31 ; USB1.A6@5546.2,2144.1 ccw(c5541.24,2139.14) 5541.24,2146.16 ccw(c5541.24,2153.17) USB1.A6@5546.2,2148.21 ; USB1.B6 5565.52,2185 v1@5639,2185 ; USB1.A6@5566.83,2148 USB1.A6 ; USB1.A6@5583.78,2144.1 cw(c5588.74,2139.14) 5588.74,2146.16 cw(c5588.74,2153.17) USB1.A6@5583.78,2148.21 ; USB1.B6@5583.78,2187.58 ccw(c5590.01,2193.81) 5590.01,2185 ; v1@5632.16,2146.16 USB1.A6
  Bottom Layer w6: v1(5640,2184) v1(5640,2148) 5670,2148 D+.1@5676,2154
UD-: CH1.6 D-.1 USB1.A7 USB1.B7 | length 797.9
  Top Layer w6: CH1.6@5358,2178 5364,2172 5400,2172 ; CH1.6@5383.2,2168.77 cw(c5391,2160.97) 5391,2172 ; CH1.6@5384.12,2180.14 ccw(c5400,2191.55) 5400,2172 ; USB1.A7@5546.2,2163.79 ccw(c5541.24,2158.82) 5541.24,2165.84 ccw(c5541.24,2172.86) USB1.A7@5546.2,2167.89 ; USB1.B7 5567.46,2124 v1(5610,2124) ; USB1.B7@5583.78,2128.52 ccw(c5594.7,2139.45) 5594.7,2124 ; USB1.A7@5583.78,2163.79 cw(c5588.74,2158.82) 5588.74,2165.84 cw(c5588.74,2172.86) USB1.A7@5583.78,2167.89 ; 5592.71,2165.84 ccw(c5592.71,2183.29) v1@5605.05,2170.95 ; 5593.49,2165.84 cw(c5593.49,2149.49) v1@5605.05,2161.05 ; v1@5605.05,2119.05 ccw(c5593.1,2107.1) 5593.1,2124 ccw(c5593.1,2140.9) v1@5605.05,2128.95 ; v1(5610,2166) 5609.84,2165.84 USB1.A7 5406.16,2165.84 5400,2172
  Bottom Layer w6: v1@5605.05,2128.95 ccw(c5593.1,2140.9) 5610,2140.9 ccw(c5626.9,2140.9) 5614.95,2128.95 ccw(c5626.9,2140.9) 5626.9,2124 ccw(c5626.9,2107.1) v1@5614.95,2119.05 ; v1@5605.05,2161.05 cw(c5593.1,2149.1) 5610,2149.1 cw(c5626.9,2149.1) v1@5614.95,2161.05 ; v1(5610,2166) v1(5610,2124) 5646,2124 5682,2088 D-.1@5682,2082 ; 5649,2121 ccw(c5689,2160.99) D-.1@5692.57,2104.55 ; 5658.39,2111.61 ccw(c5690.11,2143.33) D-.1@5692.95,2098.56 ; 5659.68,2110.32 cw(c5631.36,2082) D-.1@5671.41,2082 ; 5667.78,2102.22 ccw(c5691.23,2125.67) D-.1@5693.33,2092.57 ; 5669.92,2100.08 cw(c5651.84,2082) D-.1@5677.41,2082
VCC_5V: C3.2 C4.2 C6.2 P2.1 P3.2 R3.2 R4.2 R7.1 S1.1 S2.2 U1.8 VCC.1 | length 4585.1
  Top Layer w10: R4.2 R3.2 4783.89,2403.46 ; R4.2@4714.38,2393.08 cw(c4739.45,2368.01) 4739.45,2403.46 cw(c4739.45,2438.92) R4.2@4714.38,2413.85 ; P2.1@4716.53,1812 cw(c4761.26,1812) 4729.63,1843.63 ; P2.1@4726.53,1812 cw(c4795.4,1812) 4746.7,1860.7 ; P2.1@4728,1812 4728,1842 4788,1902 4788,1990 P3.2 ; P3.2@4728,2025.47 cw(c4728,1966.26) 4769.87,2008.13 cw(c4811.74,2050) P3.2@4752.53,2050 ; P3.2@4728,2035.47 cw(c4728,2000.4) 4752.8,2025.2 cw(c4777.6,2050) P3.2@4742.53,2050 ; P2.1@4736.53,1812 cw(c4829.54,1812) 4763.77,1877.77 ; P2.1@4746.53,1812 cw(c4863.68,1812) 4780.84,1894.84 ; R3.2@4747.62,2393.08 ccw(c4722.55,2368.01) 4722.55,2403.46 ccw(c4722.55,2438.92) R3.2@4747.62,2413.85 ; R3.2@4770.6,2395.93 cw(c4783.89,2387.99) 4783.89,2403.46 ; R3.2@4770.6,2411 ccw(c4783.89,2418.94) 4783.89,2403.46 ; 4860.95,2279.05 cw(c4837.91,2256) C3.2@4870.5,2256 ; C3.2@4869.4,2270.6 ccw(c4880.5,2281.69) C3.2@4880.5,2266 ; C3.2@4872,2250 C3.2@4872,2256 ; U1.8@4872.87,2213.43 cw(c4923.07,2213.43) C3.2@4887.57,2248.93 ; 4872.87,2237.57 cw(c4898.93,2237.57) C3.2 ; 4890.98,2075.02 ccw(c4920,2104.04) v1@4920,2063 ; 4908,2058 4872.87,2093.13 U1.8 4872.87,2255.13 C3.2@4872,2256 ; 4908.05,2057.95 ccw(c4920,2069.9) v1@4920,2053 ; v1(5220,2166) 5208,2154 5208,1968 5280,1896 C4.2@5460,1896 ; R7.1@5262,2430 5304,2472 5510.27,2472 S2.2 5571.5,2470.77 v1(5571.5,2448) C6.2 ; R7.1@5262,2444.12 ccw(c5262,2478.2) 5286.1,2454.1 ; R7.1@5276.69,2429.43 cw(c5313.51,2429.43) 5287.47,2455.47 ; 5424.87,1896 ccw(c5424.87,1940.63) C4.2@5456.43,1909.07 ; C4.2@5449.01,1896 ccw(c5449.01,1916.49) C4.2 ; C4.2@5460,1902 5484,1878 5484,1836 5496,1824 5532,1824 S1.1@5538,1818 ; C4.2@5463.5,1892 cw(c5463.5,1876.31) C4.2@5474.6,1887.4 ; C4.2@5473.5,1901.73 ccw(c5503.41,1900.91) 5482.25,1879.75 ; 5512.24,2473.97 ccw(c5488.95,2497.26) S2.2@5521.72,2500.54 ; 5517.98,2479.71 cw(c5536.33,2461.37) S2.2@5536.33,2487.31 ; S1.1@5525.95,1813.62 ccw(c5500.88,1788.55) 5500.88,1824 ccw(c5500.88,1859.45) S1.1@5525.95,1834.38 ; S1.1 v1(5622,1824) ; S2.2@5544.2,2487.31 cw(c5544.2,2461.37) 5562.55,2479.71 ; S1.1@5554.59,1813.62 cw(c5579.66,1788.55) 5579.66,1824 cw(c5579.66,1859.45) S1.1@5554.59,1834.38 ; S2.2@5558.86,2501.05 ccw(c5595.48,2498.68) 5569.53,2472.74 ; C6.2@5564.43,2401.07 ccw(c5547.36,2418.14) 5571.5,2418.14 ccw(c5595.64,2418.14) C6.2@5578.57,2401.07 ; v1@5567.96,2444.46 cw(c5559.43,2435.93) 5571.5,2435.93 cw(c5583.57,2435.93) v1@5575.04,2444.46 ; v1@5567.96,2451.54 ccw(c5559.43,2460.07) 5571.5,2460.07 ccw(c5583.57,2460.07) v1@5575.04,2451.54 ; v1@5618.46,1820.46 ccw(c5609.93,1811.93) 5609.93,1824 ccw(c5609.93,1836.07) v1@5618.46,1827.54 ; 4783.89,2403.46 4793.35,2394 4793.35,2334.65 4842,2286 4854,2286 4872,2268 C3.2@4872,2256
  Bottom Layer w10: P3.2@4731.2,2046.8 cw(c4758.24,2019.76) 4758.24,2058 ; P3.2@4734,2058 v1(4920,2058) 5112,2058 v1(5220,2166) VCC.1@5256,2202 ; P3.2@4738.27,2039.73 cw(c4782.39,1995.61) 4782.39,2058 ; P3.2@4745.34,2032.66 cw(c4806.53,1971.47) 4806.53,2058 ; P3.2@4745.34,2067.34 ccw(c4767.9,2089.9) 4767.9,2058 ; v1@4916.46,2054.46 ccw(c4907.93,2045.93) 4907.93,2058 ccw(c4907.93,2070.07) v1@4916.46,2061.54 ; v1@4923.54,2054.46 cw(c4932.07,2045.93) 4932.07,2058 cw(c4932.07,2070.07) v1@4923.54,2061.54 ; v1@5215,2166 cw(c5202.93,2166) 5211.46,2157.46 cw(c5220,2148.93) v1@5220,2161 ; v1@5220,2171 ccw(c5220,2183.07) 5228.54,2174.54 ccw(c5237.07,2166) v1@5225,2166 ; v1@5222.61,2168.61 cw(c5268,2123.21) VCC.1@5268,2187.41 ; 5237.09,2183.09 ccw(c5212.19,2208) VCC.1@5247.41,2208 ; 5239.68,2185.68 cw(c5268,2157.36) VCC.1@5268,2197.41 ; VCC.1@5253.44,2222.56 ccw(c5232.78,2243.22) 5262,2243.22 ; VCC.1@5262,2208 5262,2298 5412,2448 v1(5571.5,2448) ; 5262,2248.05 ccw(c5308.05,2248.05) VCC.1@5275.49,2215.49 ; 5262,2272.2 ccw(c5332.2,2272.2) VCC.1@5282.56,2222.56 ; v1@5567.96,2444.46 ccw(c5559.43,2435.93) 5559.43,2448 ccw(c5559.43,2460.07) v1@5567.96,2451.54 ; v1@5622,1823.06 v1(5622,1824)
VCC_USB: CH1.16 S1.2 USB1.A4B9 USB1.B4A9 | length 1614.3
  Top Layer w10: CH1.16 5152.76,1920.87 v1(5214,1920.87) ; CH1.16@5179.03,1929.82 ccw(c5200.64,1951.42) 5200.64,1920.87 ; v1@5210.46,1917.33 ccw(c5201.93,1908.79) 5201.93,1920.87 ccw(c5201.93,1932.94) v1@5210.46,1924.4 ; v1@5508,2065 cw(c5508,2038.44) 5526.78,2057.22 ; v1(5508,2070) 5514,2070 5526,2058 ; v1@5508.49,2250.49 USB1.B4A9 ; v1@5511.54,2246.46 cw(c5521.24,2236.76) 5521.24,2250.49 ; v1@5511.54,2253.54 ccw(c5518.9,2260.9) 5518.9,2250.49 ; 5526,2061.51 5532,2061.51 ; USB1.A4B9@5549.35,2056.69 ccw(c5537.72,2045.07) 5537.72,2061.51 ccw(c5537.72,2077.95) USB1.A4B9@5549.35,2066.33 ; USB1.B4A9@5549.35,2245.67 ccw(c5537.72,2234.04) 5537.72,2250.49 ccw(c5537.72,2266.93) USB1.B4A9@5549.35,2255.3 ; USB1.A4B9 5532,2061.51 ; v1@5629,1920 ccw(c5616.93,1920) 5625.46,1928.54 ccw(c5634,1937.07) v1@5634,1925 ; v1@5634,1915 cw(c5634,1902.93) 5642.54,1911.46 cw(c5651.07,1920) v1@5639,1920 ; S1.2@5809.41,1834.38 ccw(c5783.85,1859.95) 5820,1859.95 ; S1.2@5820,1818 5820,1866 5796,1890 5664,1890 5616,1938 5544,1938 5526,1956 5526,2058 ; 5820,1858.96 ccw(c5854.75,1858.96) S1.2@5830.18,1834.38 ; 5526,2058 5529.51,2061.51 5532,2061.51
  Bottom Layer w10: v1@5214.58,1920.28 5430,1920.28 ; v1@5217.54,1917.33 cw(c5224.66,1910.2) 5224.66,1920.28 ; v1@5217.54,1924.4 ccw(c5227.48,1934.34) 5227.48,1920.28 ; 5442.28,1920.28 5430,1920.28 ; v1@5504.46,2073.54 ccw(c5495.93,2082.07) 5508,2082.07 ccw(c5520.07,2082.07) v1@5511.54,2073.54 ; v1@5504.46,2246.46 cw(c5495.93,2237.93) 5508,2237.93 cw(c5520.07,2237.93) v1@5511.54,2246.46 ; v1(5508,2070) v1(5508,2250) ; 5598.28,1920.28 5574,1920.28 ; 5621.24,1920.28 cw(c5621.24,1907.24) v1@5630.46,1916.46 ; 5622.61,1920.28 ccw(c5622.61,1931.39) v1@5630.46,1923.54 ; v1(5634,1920) 5633.72,1920.28 5574,1920.28 ; 5430,1920.28 5574,1920.28
pads on no net: CH1.9 CH1.10 CH1.11 CH1.12 CH1.13 CH1.14 CH1.15 USB1. USB1.A5 USB1.A8 USB1.B5 USB1.B8

## Polygon pours and split planes (outlines as drawn)
GND on Bottom Layer "Bottom Layer-No Net" (solid, remove dead copper, pour order 1000): 4656,2586 4656,1734 5868,1734 5874,1728 5880,1734 5880,2586
GND on Top Layer "Bottom Layer-No Net" (solid, remove dead copper, pour order 1001): 4662,2592 4662,1734 5886,1734 5886,2592

## Keep-outs
Keep-Out Layer:
  lines w1.97: 4674,1774.97 4674,1788 ; 4674,1776 4674,2544 ; 4674,1780.97 ccw(c4714.97,1780.97) 4686,1752 ccw(c4714.97,1780.97) 4714.97,1740 ; 4674,2539.03 cw(c4714.97,2539.03) 4686,2568 cw(c4714.97,2539.03) 4714.97,2580 ; 4710,1740 5832,1740 ; 4710,2580 5832,2580 5833.03,2580 cw(c5833.03,2539.03) 5862,2568 cw(c5833.03,2539.03) 5874,2539.03 5874,2538 5874,1776 ; 5833.03,1740 ccw(c5833.03,1780.97) 5862,1752 ccw(c5833.03,1780.97) 5874,1780.97 ; 5874,1774.97 5874,1782

## Silkscreen, mask and mechanical layers (free items; w line width, h text height)
Bottom Overlay:
  text "P5^5" at 4758,2472 h30 r90
  text "P5^4" at 4860,2472 h30 r90
  text "P1^7" at 4956,2472 h30 r90
  text "P1^6" at 5052,2472 h30 r90
  text "P1^5" at 5160,2472 h30 r90
  text "P1^4" at 5256,2472 h30 r90
  text "P1^3" at 5358,2472 h30 r90
  text "P1^2" at 5460,2472 h30 r90
  text "P3^3/SDA" at 5016,2232 h30
  text "P3^2/SCL" at 5016,2154 h30
  text "VCC" at 4863.64,2042.79 h30
  text "GND" at 4860,1938 h30
  text "VCC" at 4770,1854 h30
  text "GND" at 4872,1854 h30
  text "P3^4" at 4901,1854 h30 r270
  text "P3^5" at 5002,1854 h30 r270
  text "P3^6" at 5103,1854 h30 r270
  text "P3^7" at 5204,1854 h30 r270
  text "P1^0" at 5305,1854 h30 r270
  text "P1^1" at 5406,1854 h30 r270

## Dimensions
4710,2580 to 4710,1740 on Mechanical 1
4674,2544 to 5874,2538 on Mechanical 1